# Altium PCB main.PcbDoc (part 7 of 16)
Units mil, origin at the board's own origin, x right, y up, seen from the top; angles counter-clockwise.
Board outline 8394.75 x 5164.44 mil, 7 copper layers (Top Layer 1, Layer 2, Layer 3, Unused, Layer 4_pow, Layer 5_gnd, Bottom 6+gnd), stack 64.043 mil thick; 364 components, 409 nets, 1932 pads, 1061 vias.
Unrouted connection lines stored in the file: 2.
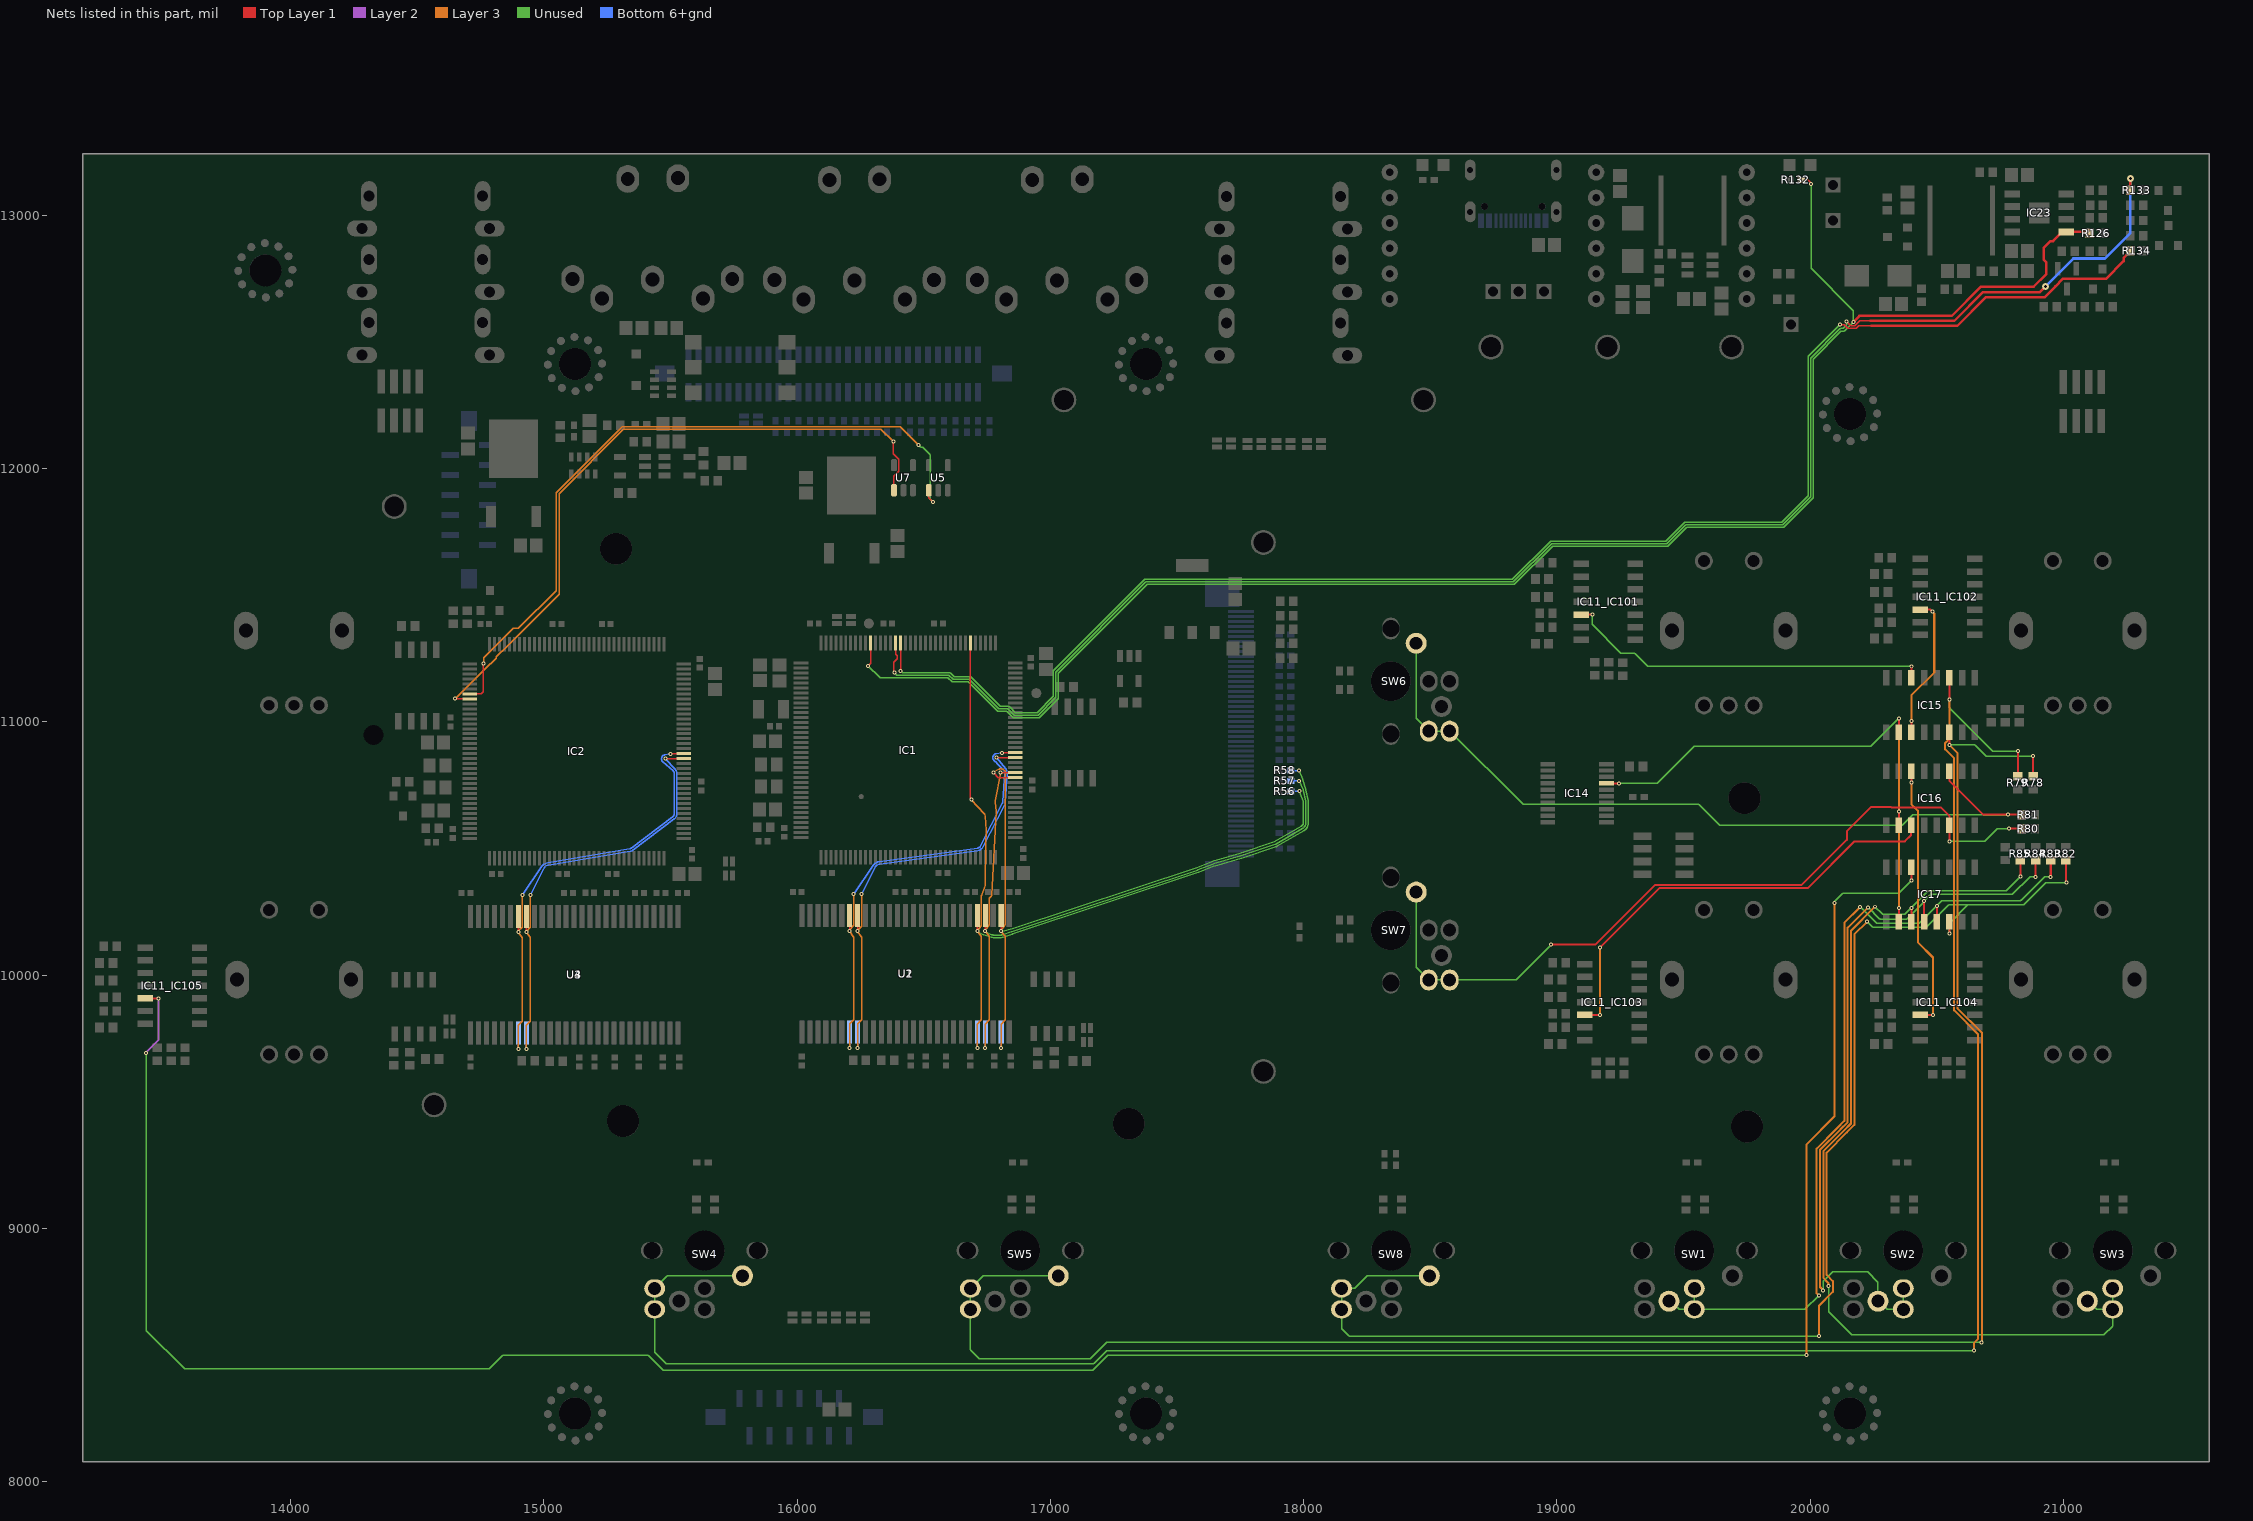
[diagram p10: the nets of this part, all layers, seen from the top]

## Via types
v1: diameter 15.75, hole 7.87, Top Layer 1 to Bottom 6+gnd, tented both sides, 961 vias
v2: diameter 27.56, hole 11.81, Top Layer 1 to Bottom 6+gnd, 45 vias
v3: diameter 23.62/23.62/23.62/23.62/23.62/23.62/23.62 (per signal layer), hole 12, Top Layer 1 to Bottom 6+gnd, tented top, 42 vias
v4: diameter 15.75, hole 7.87, Top Layer 1 to Bottom 6+gnd, 10 vias
v5: diameter 23.62/23.62/23.62/23.62/23.62/23.62/23.62 (per signal layer), hole 12, Top Layer 1 to Bottom 6+gnd, tented bottom, 3 vias

## Nets (pads, with @x,y where several pads share a name; then routed paths per layer and width w, separated by ;. In a path a pad name is that pad's centre, name@x,y a point inside that pad or via, vN(x,y) a via of type N, cw(c..) or ccw(c..) an arc to the next point about the centre after c; other vN are vias at no path point) (continued)
BA0_6: IC1.89 U1.20 U2.20 | length 2533.8
  Top Layer 1 w5: v1(16238.93,10174.13) U1.20@16238.93,10235.97 ; v1@16239.17,10174.38 U1.20@16239.17,10236.22 ; v1@16788.31,10859.29 IC1.89@16860.91,10859.29
  Layer 3 w5: v1(16238.93,9713.5) 16238.93,9805.11 cw(c16243.93,9805.12) 16240.37,9808.63 16253.59,9821.89 ; v1(16238.93,10174.13) ccw(c16243.89,10174.74) 16239.9,10171.73 16254.05,10152.93 ; v1@16238.93,10176.85 16238.93,10175.35 cw(c16243.89,10174.74) v1@16240.32,10178.25 ; v1@16240.33,10178.25 16253.59,10191.56 ccw(c16250.05,10195.09) 16255.05,10195 ; 16255.05,9825.38 16255.05,10150.02 ; 16255.05,10195.04 v1@16255.05,10316.84 ; 16253.59,9821.89 ccw(c16250.05,9825.42) 16255.05,9825.33 ; 16253.59,9821.89 ccw(c16250.05,9825.42) 16255.05,9825.33 ; 16253.59,9821.89 ccw(c16250.05,9825.42) 16255.05,9825.33 ; 16253.59,9821.89 ccw(c16250.05,9825.42) 16255.05,9825.33 ; 16253.59,9821.89 ccw(c16250.05,9825.42) 16255.05,9825.33 ; 16253.59,9821.89 ccw(c16250.05,9825.42) 16255.05,9825.33 ; 16253.59,9821.89 ccw(c16250.05,9825.42) 16255.05,9825.33 ; 16253.59,9821.89 ccw(c16250.05,9825.42) 16255.05,9825.33 ; 16253.59,9821.89 ccw(c16250.05,9825.42) 16255.05,9825.33 ; 16253.59,9821.89 ccw(c16250.05,9825.42) 16255.05,9825.33 ; 16253.59,9821.89 ccw(c16250.05,9825.42) 16255.05,9825.33 ; 16253.59,9821.89 ccw(c16250.05,9825.42) 16255.05,9825.33 ; 16253.59,9821.89 ccw(c16250.05,9825.42) 16255.05,9825.33 ; 16253.59,9821.89 ccw(c16250.05,9825.42) 16255.05,9825.33 ; 16253.59,9821.89 ccw(c16250.05,9825.42) 16255.05,9825.33 ; 16253.59,9821.89 ccw(c16250.05,9825.42) 16255.05,9825.33 ; 16254.05,10152.94 cw(c16250.05,10149.93) 16255.05,10150.02 ; 16254.05,10152.94 cw(c16250.05,10149.93) 16255.05,10150.02 ; 16254.05,10152.94 cw(c16250.05,10149.93) 16255.05,10150.02 ; 16254.05,10152.94 cw(c16250.05,10149.93) 16255.05,10150.02 ; 16254.05,10152.94 cw(c16250.05,10149.93) 16255.05,10150.02 ; 16254.05,10152.94 cw(c16250.05,10149.93) 16255.05,10150.02 ; 16254.05,10152.94 cw(c16250.05,10149.93) 16255.05,10150.02 ; 16254.05,10152.94 cw(c16250.05,10149.93) 16255.05,10150.02 ; 16254.05,10152.94 cw(c16250.05,10149.93) 16255.05,10150.02 ; 16254.05,10152.94 cw(c16250.05,10149.93) 16255.05,10150.02 ; 16254.05,10152.94 cw(c16250.05,10149.93) 16255.05,10150.02 ; 16254.05,10152.94 cw(c16250.05,10149.93) 16255.05,10150.02 ; 16254.05,10152.94 cw(c16250.05,10149.93) 16255.05,10150.02 ; 16254.05,10152.94 cw(c16250.05,10149.93) 16255.05,10150.02 ; 16254.05,10152.94 cw(c16250.05,10149.93) 16255.05,10150.02 ; 16254.05,10152.94 cw(c16250.05,10149.93) 16255.05,10150.02
  Bottom 6+gnd w5: v1@16239.17,9713.75 U2.20@16239.17,9775.59 ; v1(16254.76,10320.11) 16307.25,10424.96 ; v1(16788.23,10859.21) 16823.61,10815.7 ; 16307.25,10424.96 cw(c16329.94,10413.6) 16326.53,10438.74 ; 16307.25,10424.96 cw(c16329.94,10413.6) 16326.53,10438.74 ; 16307.25,10424.96 cw(c16329.94,10413.6) 16326.53,10438.74 ; 16307.25,10424.96 cw(c16329.94,10413.6) 16326.53,10438.74 ; 16307.25,10424.96 cw(c16329.94,10413.6) 16326.53,10438.74 ; 16307.25,10424.96 cw(c16329.94,10413.6) 16326.53,10438.74 ; 16307.25,10424.96 cw(c16329.94,10413.6) 16326.53,10438.74 ; 16307.25,10424.96 cw(c16329.94,10413.6) 16326.53,10438.74 ; 16307.25,10424.96 cw(c16329.94,10413.6) 16326.53,10438.74 ; 16307.25,10424.96 cw(c16329.94,10413.6) 16326.53,10438.74 ; 16307.25,10424.96 cw(c16329.94,10413.6) 16326.53,10438.74 ; 16307.25,10424.96 cw(c16329.94,10413.6) 16326.53,10438.74 ; 16307.25,10424.96 cw(c16329.94,10413.6) 16326.53,10438.74 ; 16307.25,10424.96 cw(c16329.94,10413.6) 16326.53,10438.74 ; 16307.25,10424.96 cw(c16329.94,10413.6) 16326.53,10438.74 ; 16307.25,10424.96 cw(c16329.94,10413.6) 16326.53,10438.74 ; 16326.53,10438.74 16713.7,10492.07 ccw(c16710.24,10517.2) 16732.79,10505.57 16819.54,10673.8 ; 16819.54,10673.8 ccw(c16796.99,10685.43) 16822.31,10683.89 ; 16819.54,10673.8 ccw(c16796.99,10685.43) 16822.31,10683.89 ; 16819.54,10673.8 ccw(c16796.99,10685.43) 16822.31,10683.89 ; 16819.54,10673.8 ccw(c16796.99,10685.43) 16822.31,10683.89 ; 16819.54,10673.8 ccw(c16796.99,10685.43) 16822.31,10683.89 ; 16819.54,10673.8 ccw(c16796.99,10685.43) 16822.31,10683.89 ; 16819.54,10673.8 ccw(c16796.99,10685.43) 16822.31,10683.89 ; 16819.54,10673.8 ccw(c16796.99,10685.43) 16822.31,10683.89 ; 16819.54,10673.8 ccw(c16796.99,10685.43) 16822.31,10683.89 ; 16819.54,10673.8 ccw(c16796.99,10685.43) 16822.31,10683.89 ; 16819.54,10673.8 ccw(c16796.99,10685.43) 16822.31,10683.89 ; 16819.54,10673.8 ccw(c16796.99,10685.43) 16822.31,10683.89 ; 16819.54,10673.8 ccw(c16796.99,10685.43) 16822.31,10683.89 ; 16819.54,10673.8 ccw(c16796.99,10685.43) 16822.31,10683.89 ; 16819.54,10673.8 ccw(c16796.99,10685.43) 16822.31,10683.89 ; 16819.54,10673.8 ccw(c16796.99,10685.43) 16822.31,10683.89 ; 16822.31,10683.89 16829.25,10798.15 ; 16823.61,10815.7 cw(c16803.93,10799.69) 16829.25,10798.16 ; 16823.61,10815.7 cw(c16803.93,10799.69) 16829.25,10798.16 ; 16823.61,10815.7 cw(c16803.93,10799.69) 16829.25,10798.16 ; 16823.61,10815.7 cw(c16803.93,10799.69) 16829.25,10798.16 ; 16823.61,10815.7 cw(c16803.93,10799.69) 16829.25,10798.15
BA1_6: IC1.90 U1.21 U2.21 | length 2022.6
  Top Layer 1 w5: v1(16207.43,10174.13) U1.21@16207.43,10235.97 ; v1@16207.68,10174.38 U1.21@16207.68,10236.22 ; v1(16808.23,10878.44) 16808.49,10878.71 16860.64,10878.71 IC1.90@16860.75,10878.82
  Layer 3 w5: v1(16207.43,9713.5) 16207.43,9805.11 cw(c16212.43,9805.12) 16208.88,9808.63 16222.1,9821.89 ; v1(16207.43,10174.13) ccw(c16211.59,10176.92) 16207.52,10174.01 16222.63,10152.83 ; v1@16207.43,10179.83 16207.43,10179.7 cw(c16211.59,10176.92) 16208.01,10180.41 16222.1,10194.54 ; 16223.55,9825.38 16223.55,10150.02 ; v1@16223.55,10319.82 16223.55,10198.02 ; 16222.1,9821.89 ccw(c16218.55,9825.42) 16223.55,9825.33 ; 16222.1,9821.89 ccw(c16218.55,9825.42) 16223.55,9825.33 ; 16222.1,9821.89 ccw(c16218.55,9825.42) 16223.55,9825.33 ; 16222.1,9821.89 ccw(c16218.55,9825.42) 16223.55,9825.33 ; 16222.1,9821.89 ccw(c16218.55,9825.42) 16223.55,9825.33 ; 16222.1,9821.89 ccw(c16218.55,9825.42) 16223.55,9825.33 ; 16222.1,9821.89 ccw(c16218.55,9825.42) 16223.55,9825.33 ; 16222.1,9821.89 ccw(c16218.55,9825.42) 16223.55,9825.33 ; 16222.1,9821.89 ccw(c16218.55,9825.42) 16223.55,9825.33 ; 16222.1,9821.89 ccw(c16218.55,9825.42) 16223.55,9825.33 ; 16222.1,9821.89 ccw(c16218.55,9825.42) 16223.55,9825.33 ; 16222.1,9821.89 ccw(c16218.55,9825.42) 16223.55,9825.33 ; 16222.1,9821.89 ccw(c16218.55,9825.42) 16223.55,9825.33 ; 16222.1,9821.89 ccw(c16218.55,9825.42) 16223.55,9825.33 ; 16222.1,9821.89 ccw(c16218.55,9825.42) 16223.55,9825.33 ; 16222.1,9821.89 ccw(c16218.55,9825.42) 16223.55,9825.33 ; 16222.1,10194.54 ccw(c16218.55,10198.07) 16223.55,10197.98 ; 16222.1,10194.54 ccw(c16218.55,10198.07) 16223.55,10197.98 ; 16222.1,10194.54 ccw(c16218.55,10198.07) 16223.55,10197.98 ; 16222.1,10194.54 ccw(c16218.55,10198.07) 16223.55,10197.98 ; 16222.1,10194.54 ccw(c16218.55,10198.07) 16223.55,10197.98 ; 16222.1,10194.54 ccw(c16218.55,10198.07) 16223.55,10197.98 ; 16222.1,10194.54 ccw(c16218.55,10198.07) 16223.55,10197.98 ; 16222.1,10194.54 ccw(c16218.55,10198.07) 16223.55,10197.98 ; 16222.1,10194.54 ccw(c16218.55,10198.07) 16223.55,10197.98 ; 16222.1,10194.54 ccw(c16218.55,10198.07) 16223.55,10197.98 ; 16222.1,10194.54 ccw(c16218.55,10198.07) 16223.55,10197.98 ; 16222.1,10194.54 ccw(c16218.55,10198.07) 16223.55,10197.98 ; 16222.1,10194.54 ccw(c16218.55,10198.07) 16223.55,10197.98 ; 16222.1,10194.54 ccw(c16218.55,10198.07) 16223.55,10197.98 ; 16222.1,10194.54 ccw(c16218.55,10198.07) 16223.55,10197.98 ; 16222.1,10194.54 ccw(c16218.55,10198.07) 16223.55,10197.98 ; 16222.62,10152.83 cw(c16218.55,10149.93) 16223.55,10150.02 ; 16222.62,10152.83 cw(c16218.55,10149.93) 16223.55,10150.02 ; 16222.62,10152.83 cw(c16218.55,10149.93) 16223.55,10150.02 ; 16222.62,10152.83 cw(c16218.55,10149.93) 16223.55,10150.02 ; 16222.62,10152.83 cw(c16218.55,10149.93) 16223.55,10150.02 ; 16222.62,10152.83 cw(c16218.55,10149.93) 16223.55,10150.02 ; 16222.62,10152.83 cw(c16218.55,10149.93) 16223.55,10150.02 ; 16222.62,10152.83 cw(c16218.55,10149.93) 16223.55,10150.02 ; 16222.62,10152.83 cw(c16218.55,10149.93) 16223.55,10150.02 ; 16222.62,10152.83 cw(c16218.55,10149.93) 16223.55,10150.02 ; 16222.62,10152.83 cw(c16218.55,10149.93) 16223.55,10150.02 ; 16222.62,10152.83 cw(c16218.55,10149.93) 16223.55,10150.02 ; 16222.62,10152.83 cw(c16218.55,10149.93) 16223.55,10150.02 ; 16222.62,10152.83 cw(c16218.55,10149.93) 16223.55,10150.02 ; 16222.62,10152.83 cw(c16218.55,10149.93) 16223.55,10150.02 ; 16222.62,10152.83 cw(c16218.55,10149.93) 16223.55,10150.02
  Bottom 6+gnd w5: v1@16207.68,9713.75 U2.21@16207.68,9775.59 ; v1(16223.27,10320.11) 16300.72,10433.55 cw(c16329.94,10413.6) 16325.11,10448.64 16712.33,10501.97 ccw(c16710.24,10517.2) 16723.9,10510.16 16810.65,10678.38 ccw(c16796.99,10685.43) 16812.33,10684.49 16819.27,10798.76 ccw(c16803.93,10799.69) 16814.85,10810.51 16792.52,10832.83 16792.52,10833.37 16783.46,10842.43 16783.27,10842.43 16777.31,10848.39 cw(c16788.23,10859.21) 16785.41,10874.33 ; 16785.41,10874.32 v1@16808.2,10878.58 ; v1(16808.23,10878.44) v1@16808.23,10878.55
BA01_7: IC2.89 U3.20 U4.20 | length 2319.1
  Top Layer 1 w5: v1@14930.87,10170.19 U3.20@14930.87,10232.03 ; v1@15480.01,10855.1 IC2.89@15552.61,10855.1
  Layer 3 w5: v1(14930.63,9709.47) 14930.63,9803 14946.75,9819.12 14946.75,10147.74 14945.53,10149.03 14931.6,10167.54 cw(c14935.59,10170.55) v1(14930.63,10169.94) ; v1@14930.63,10171.16 cw(c14935.59,10170.55) v1@14932.02,10174.06 ; v1@14932.03,10174.06 14945.29,10187.37 ccw(c14941.75,10190.9) 14946.75,10190.81 ; 14946.75,10190.85 v1@14946.75,10312.65
  Bottom 6+gnd w5: v1(14930.63,9709.47) 14930.63,9771.15 U4.20@14930.87,9771.4 ; v1@14946.22,10316.17 v1(14946.46,10315.92) 14998.95,10420.77 cw(c15021.64,10409.41) 15017.42,10434.43 15340.56,10489.38 ; v1@15479.68,10855.27 v1(15479.93,10855.02) 15518.63,10812.8 ; 15340.56,10489.38 ccw(c15336.31,10514.39) 15351.61,10494.16 ; 15340.56,10489.38 ccw(c15336.31,10514.39) 15351.61,10494.16 ; 15340.56,10489.38 ccw(c15336.31,10514.39) 15351.61,10494.16 ; 15340.56,10489.38 ccw(c15336.31,10514.39) 15351.61,10494.16 ; 15340.56,10489.38 ccw(c15336.31,10514.39) 15351.61,10494.16 ; 15340.56,10489.38 ccw(c15336.31,10514.39) 15351.61,10494.16 ; 15340.56,10489.38 ccw(c15336.31,10514.39) 15351.61,10494.16 ; 15340.56,10489.38 ccw(c15336.31,10514.39) 15351.61,10494.16 ; 15340.56,10489.38 ccw(c15336.31,10514.39) 15351.61,10494.16 ; 15340.56,10489.38 ccw(c15336.31,10514.39) 15351.61,10494.16 ; 15340.56,10489.38 ccw(c15336.31,10514.39) 15351.61,10494.16 ; 15340.56,10489.38 ccw(c15336.31,10514.39) 15351.61,10494.16 ; 15340.56,10489.38 ccw(c15336.31,10514.39) 15351.61,10494.16 ; 15340.56,10489.38 ccw(c15336.31,10514.39) 15351.61,10494.16 ; 15340.56,10489.38 ccw(c15336.31,10514.39) 15351.61,10494.16 ; 15340.56,10489.38 ccw(c15336.31,10514.39) 15351.61,10494.16 ; 15351.62,10494.16 15515.24,10617.94 ; 15515.24,10617.94 ccw(c15499.93,10638.17) 15525.3,10638.17 ; 15515.24,10617.94 ccw(c15499.93,10638.17) 15525.3,10638.17 ; 15515.24,10617.94 ccw(c15499.93,10638.17) 15525.3,10638.17 ; 15515.24,10617.94 ccw(c15499.93,10638.17) 15525.3,10638.17 ; 15515.24,10617.94 ccw(c15499.93,10638.17) 15525.3,10638.17 ; 15518.63,10812.8 cw(c15499.93,10795.65) 15525.3,10795.65 ; 15518.63,10812.8 cw(c15499.93,10795.65) 15525.3,10795.65 ; 15518.63,10812.8 cw(c15499.93,10795.65) 15525.3,10795.65 ; 15518.63,10812.8 cw(c15499.93,10795.65) 15525.3,10795.65 ; 15518.63,10812.8 cw(c15499.93,10795.65) 15525.3,10795.65 ; 15518.63,10812.8 cw(c15499.93,10795.65) 15525.3,10795.65 ; 15518.63,10812.8 cw(c15499.93,10795.65) 15525.3,10795.65 ; 15518.63,10812.8 cw(c15499.93,10795.65) 15525.3,10795.65 ; 15518.63,10812.8 cw(c15499.93,10795.65) 15525.3,10795.65 ; 15518.63,10812.8 cw(c15499.93,10795.65) 15525.3,10795.65 ; 15518.63,10812.8 cw(c15499.93,10795.65) 15525.3,10795.65 ; 15518.63,10812.8 cw(c15499.93,10795.65) 15525.3,10795.65 ; 15518.63,10812.8 cw(c15499.93,10795.65) 15525.3,10795.65 ; 15518.63,10812.8 cw(c15499.93,10795.65) 15525.3,10795.65 ; 15518.63,10812.8 cw(c15499.93,10795.65) 15525.3,10795.65 ; 15518.63,10812.8 cw(c15499.93,10795.65) 15525.3,10795.65 ; 15525.3,10638.17 15525.3,10795.65
BA11_7: IC2.90 U3.21 U4.21 | length 2339
  Top Layer 1 w5: v1@14899.38,10170.19 U3.21@14899.38,10232.03 ; v1@15500.16,10874.63 IC2.90@15552.45,10874.63
  Layer 3 w5: v1(14899.13,9709.47) 14899.13,9803 14915.25,9819.12 14915.25,10147.71 14914.08,10148.98 14899.22,10169.82 cw(c14903.29,10172.73) v1(14899.13,10169.94) ; v1@14899.13,10175.64 14899.13,10175.51 cw(c14903.29,10172.73) 14899.71,10176.22 14913.8,10190.35 ; 14915.25,10193.83 v1@14915.25,10315.63 ; 14913.8,10190.35 ccw(c14910.25,10193.88) 14915.25,10193.79 ; 14913.8,10190.35 ccw(c14910.25,10193.88) 14915.25,10193.79 ; 14913.8,10190.35 ccw(c14910.25,10193.88) 14915.25,10193.79 ; 14913.8,10190.35 ccw(c14910.25,10193.88) 14915.25,10193.79 ; 14913.8,10190.35 ccw(c14910.25,10193.88) 14915.25,10193.79 ; 14913.8,10190.35 ccw(c14910.25,10193.88) 14915.25,10193.79 ; 14913.8,10190.35 ccw(c14910.25,10193.88) 14915.25,10193.79 ; 14913.8,10190.35 ccw(c14910.25,10193.88) 14915.25,10193.79 ; 14913.8,10190.35 ccw(c14910.25,10193.88) 14915.25,10193.79 ; 14913.8,10190.35 ccw(c14910.25,10193.88) 14915.25,10193.79 ; 14913.8,10190.35 ccw(c14910.25,10193.88) 14915.25,10193.79 ; 14913.8,10190.35 ccw(c14910.25,10193.88) 14915.25,10193.79 ; 14913.8,10190.35 ccw(c14910.25,10193.88) 14915.25,10193.79 ; 14913.8,10190.35 ccw(c14910.25,10193.88) 14915.25,10193.79 ; 14913.8,10190.35 ccw(c14910.25,10193.88) 14915.25,10193.79 ; 14913.8,10190.35 ccw(c14910.25,10193.88) 14915.25,10193.79
  Bottom 6+gnd w5: v1(14899.13,9709.47) 14899.13,9771.15 U4.21@14899.38,9771.4 ; v1@14914.72,10316.17 v1(14914.97,10315.92) 14992.42,10429.36 ; v1@15499.68,10874.64 v1(15499.93,10874.39) 15477.11,10870.13 ccw(c15479.93,10855.02) 15469.64,10843.6 15510.21,10807.08 cw(c15499.93,10795.65) 15515.3,10795.65 15515.3,10638.17 ; 14992.42,10429.36 cw(c15021.64,10409.41) 15015.71,10444.28 ; 14992.42,10429.36 cw(c15021.64,10409.41) 15015.71,10444.28 ; 14992.42,10429.36 cw(c15021.64,10409.41) 15015.71,10444.28 ; 14992.42,10429.36 cw(c15021.64,10409.41) 15015.71,10444.28 ; 14992.42,10429.36 cw(c15021.64,10409.41) 15015.71,10444.28 ; 14992.42,10429.36 cw(c15021.64,10409.41) 15015.71,10444.28 ; 14992.42,10429.36 cw(c15021.64,10409.41) 15015.71,10444.28 ; 14992.42,10429.36 cw(c15021.64,10409.41) 15015.71,10444.28 ; 14992.42,10429.36 cw(c15021.64,10409.41) 15015.71,10444.28 ; 14992.42,10429.36 cw(c15021.64,10409.41) 15015.71,10444.28 ; 14992.42,10429.36 cw(c15021.64,10409.41) 15015.71,10444.28 ; 14992.42,10429.36 cw(c15021.64,10409.41) 15015.71,10444.28 ; 14992.42,10429.36 cw(c15021.64,10409.41) 15015.71,10444.28 ; 14992.42,10429.36 cw(c15021.64,10409.41) 15015.71,10444.28 ; 14992.42,10429.36 cw(c15021.64,10409.41) 15015.71,10444.28 ; 14992.42,10429.36 cw(c15021.64,10409.41) 15015.71,10444.28 ; 15015.71,10444.28 15338.88,10499.24 ccw(c15336.31,10514.39) 15345.58,10502.13 15509.2,10625.91 ; 15509.21,10625.92 ccw(c15499.93,10638.17) 15515.3,10638.17 ; 15509.21,10625.92 ccw(c15499.93,10638.17) 15515.3,10638.17 ; 15509.21,10625.92 ccw(c15499.93,10638.17) 15515.3,10638.17 ; 15509.21,10625.92 ccw(c15499.93,10638.17) 15515.3,10638.17 ; 15509.2,10625.91 ccw(c15499.93,10638.17) 15515.3,10638.17
BTN_1: IC11_IC101.12 IC15.14 | length 1458.7
  Top Layer 1 w8: IC11_IC101.12@19095.43,11423.82 19138.82,11423.82 v1(19140,11425) ; IC15.14@20400,11173.82 v1(20400,11220)
  Unused w5: v1(19140,11425) 19140,11387.07 ccw(c19145,11387.07) 19141.45,11383.55 19253.12,11271.88 ccw(c19256.64,11275.43) 19256.64,11270.43 19305.82,11270.43 cw(c19305.82,11265.43) 19309.33,11268.99 19356.87,11221.45 ccw(c19360.39,11225) 19360.39,11220 v1(20400,11220)
BTN_2: IC11_IC102.12 IC15.3 | length 568.1
  Top Layer 1 w8: IC15.3@20400,10959.25 v1(20400,11003.54) ; IC11_IC102.12@20435,11443.82 20475,11443.82 v1(20482.5,11436.32)
  Layer 3 w8: v1(20400,11003.54) 20400,11105 20490,11195 20490,11428.82 v1(20482.5,11436.32)
BTN_3: IC11_IC103.12 IC16.3 | length 1775.9
  Top Layer 1 w8: IC11_IC103.12@19110.43,9843.82 v1(19170,9843.82) ; v1(19170,10108.82) 19404.86,10343.68 19989.8,10343.68 20175,10528.88 20373.78,10528.88 20398.61,10553.71 20398.61,10590.15 IC16.3@20400,10591.53
  Layer 3 w8: v1(19170,9843.82) v1(19170,10108.82)
BTN_4: IC11_IC104.12 IC16.14 | length 1047.5
  Top Layer 1 w8: v1(20400,10761.81) IC16.14@20400,10806.1 ; IC11_IC104.12@20435,9843.82 v1(20485,9843.82)
  Layer 3 w8: v1(20400,10761.81) 20400,10675 20425,10650 20425,10130 20485,10070 v1(20485,9843.82)
BTN_5: IC11_IC105.12 IC17.14 | length 10296.6
  Top Layer 1 w8: IC11_IC105.12@13425.86,9908.82 v1(13478.15,9908.82) ; v1(20400,10373.82) IC17.14@20400,10426.1
  Layer 2 w8: v1(13429.65,9693.82) 13429.65,9695.31 13478.15,9743.82 v1(13478.15,9908.82)
  Unused w5: v1(13429.65,9693.82) 13429.65,8600.56 ccw(c13434.65,8600.56) 13431.09,8597.04 13580.39,8447.75 ccw(c13583.91,8451.3) 13583.91,8446.3 14783.08,8446.3 ccw(c14783.08,8451.3) 14786.6,8447.75 14836.41,8497.55 cw(c14839.93,8494) 14839.93,8499 15410.31,8499 cw(c15410.31,8494) 15413.83,8497.55 15469.85,8441.53 ccw(c15473.37,8445.08) 15473.37,8440.08 17164.91,8440.08 ccw(c17164.91,8445.08) 17168.43,8441.53 17225.29,8498.39 cw(c17228.81,8494.84) 17228.81,8499.84 19978.2,8499.84 19982.46,8499.9 ccw(c19982.38,8504.9) v1(19985.94,8501.39) ; v1(20096.12,10285.74) 20097.77,10291.84 cw(c20102.6,10290.53) 20099.05,10294.05 20126.55,10321.55 cw(c20130.07,10318) 20130.07,10323 20347.11,10323 ccw(c20347.11,10328) 20350.63,10324.45 v1(20400,10373.82)
  Layer 3 w8: v1(19985.94,8501.39) 19986.2,8501.65 19986.2,9332.52 20096.28,9442.6 20096.28,10285.57 v1(20096.12,10285.74)
BTN_DN: IC16.6 R80.1 SW7.S1 | length 3145.1
  Top Layer 1 w8: v1(18977.44,10120.5) 19152.16,10120.5 19388.34,10356.68 19966.68,10356.68 20145,10535 20145,10568.82 20240,10663.82 20320,10663.82 20320.84,10662.98 20515.84,10662.98 20549.46,10629.36 20549.46,10592.08 IC16.6@20550,10591.53 v1(20550,10528.82) ; v1(20785,10578.82) R80.1@20835,10578.82
  Unused w5: SW7.S1@18444.49,10328.22 18444.49,10033.05 ccw(c18449.49,10033.05) 18445.93,10029.53 SW7.S1@18494.09,9981.37 18836.24,9981.37 ccw(c18836.24,9986.37) 18839.76,9982.82 v1(18977.44,10120.5) ; v1(20550,10528.82) 20686.92,10528.82 ccw(c20686.92,10533.82) 20690.44,10530.27 20737.55,10577.37 cw(c20741.07,10573.82) 20741.07,10578.82 v1(20785,10578.82)
BTN_FUNC: IC17.6 R82.1 SW8.S1 | length 5304.7
  Top Layer 1 w8: v1(20549.62,10164) IC17.6@20549.62,10211.15 ; R82.1@21010,10453.86 21010,10367.7 v1(21011.35,10366.35)
  Unused w5: SW8.S1@18496.46,8813.12 18252.04,8813.12 ccw(c18252.04,8808.12) 18248.52,8811.67 18201.81,8764.97 cw(c18198.29,8768.52) 18198.29,8763.52 SW8.S1@18149.61,8763.52 18149.61,8607.46 ccw(c18154.61,8607.46) 18151.06,8603.94 18178.55,8576.45 ccw(c18182.07,8580) 18182.07,8575 v1(20035,8575) ; v1(20224.83,10211.6) ccw(c20228.48,10215.01) 20224.92,10211.5 20244.97,10191.45 ccw(c20248.49,10195) 20248.49,10190 20457.1,10190 ccw(c20457.1,10195) 20460.62,10191.45 20545.46,10276.29 cw(c20548.98,10272.74) 20548.98,10277.74 20622.61,10277.74 ; v1(20549.62,10164) 20549.62,10202.68 cw(c20554.62,10202.68) 20551.07,10206.2 20622.61,10277.74 ; v1(21011.35,10366.35) cw(c21007.93,10370) 21007.96,10365 20931.17,10365 ccw(c20931.17,10360) 20927.65,10363.55 20843.29,10279.19 cw(c20839.77,10282.74) 20839.77,10277.74 20622.61,10277.74
  Layer 3 w8: v1(20035,8575) 20035,8695 20089.63,8749.63 20089.63,8791.86 20064.77,8816.73 20064.77,9299.55 20145,9379.79 20145,9380 20174.28,9409.28 20174.28,10161.05 v1(20224.83,10211.6)
BTN_N: IC15.6 R78.1 SW5.S1 | length 7535.8
  Top Layer 1 w8: v1(20550,10910) IC15.6@20550,10959.25 ; R78.1@20880,10785 v1(20880,10865)
  Unused w5: SW5.S1@17031.21,8813.12 16736.04,8813.12 ccw(c16736.04,8808.12) 16732.52,8811.67 SW5.S1@16684.36,8763.52 16684.36,8522.71 ccw(c16689.36,8522.71) 16685.81,8519.19 16718.55,8486.45 ccw(c16722.07,8490) 16722.07,8485 17153.39,8485 ccw(c17153.39,8490) 17156.91,8486.45 17219.98,8549.52 cw(c17223.5,8545.97) 17223.5,8550.97 20674.2,8550.97 cw(c20674.16,8545.97) v1(20677.39,8549.78) ; v1(20550,10910) 20647.44,10910 cw(c20647.44,10905) 20650.95,10908.56 20693.55,10866.45 ccw(c20697.07,10870) 20697.07,10865 v1(20880,10865)
  Layer 3 w8: v1(20550,10910) 20581.6,10878.4 20581.6,9870.29 20678.46,9773.43 20678.46,8550.85 v1(20677.39,8549.78)
BTN_PLAY: IC17.4 R84.1 SW2.S2 | length 3049.6
  Top Layer 1 w8: IC17.4@20450,10211.53 v1(20450,10293.82) ; v1(20889.29,10388.79) 20890,10389.5 R84.1@20890,10453.86
  Unused w5: v1(20051.49,8756.15) 20051.49,8789.42 cw(c20056.49,8789.42) 20052.94,8792.94 20088.55,8828.55 cw(c20092.07,8825) 20092.07,8830 20222.93,8830 cw(c20222.93,8825) 20226.45,8828.55 20266.28,8788.72 cw(c20262.72,8785.2) 20267.72,8785.2 SW2.S2@20267.72,8713.12 20269.89,8713.12 cw(c20269.89,8708.12) 20273.43,8711.66 20302.8,8682.28 ccw(c20306.32,8685.84) 20306.32,8680.84 SW2.S2@20367.72,8680.84 SW2.S2@20367.72,8763.52 ; v1(20228.83,10268.28) 20273.73,10223.39 ccw(c20277.25,10226.94) 20277.25,10221.94 20380.81,10221.94 ccw(c20380.81,10226.94) 20384.32,10223.39 20444.88,10283.94 ccw(c20441.33,10287.46) 20445.82,10285.26 v1(20450,10293.82) 20474.73,10318.55 cw(c20478.25,10315) 20478.25,10320 20796.76,10320 ccw(c20796.76,10325) 20800.28,10321.45 20866.18,10387.35 cw(c20869.7,10383.79) 20869.7,10388.79 v1(20889.29,10388.79)
  Layer 3 w8: v1(20051.49,8756.15) 20038.77,8768.88 20038.77,9310.32 20119,9390.56 20119,9390.77 20148.28,9420.05 20148.28,10187.73 v1(20228.83,10268.28)
  Bottom 6+gnd w8: SW2.S2@20367.72,8680.84 SW2.S2@20367.72,8682.94
BTN_REC: IC17.5 R83.1 SW1.S2 | length 3299.5
  Top Layer 1 w8: IC17.5@20500,10211.53 v1(20500,10273.82) ; v1(20949.8,10388.45) 20950,10388.65 R83.1@20950,10453.27
  Unused w5: SW1.S2@19442.61,8713.12 19447.03,8713.12 cw(c19447.03,8708.12) 19450.54,8711.68 19480.27,8682.29 ccw(c19483.79,8685.84) 19483.79,8680.84 SW1.S2@19542.61,8680.84 ; SW1.S2@19542.61,8763.52 SW1.S2@19542.61,8680.84 ; v1(20034.13,8735.07) 19981.34,8682.29 cw(c19977.82,8685.84) 19977.82,8680.84 SW1.S2@19542.61,8680.84 ; v1(20197.54,10269.57) 20260.66,10206.45 ccw(c20264.18,10210) 20264.18,10205 20429.11,10205 ccw(c20429.11,10210) 20432.63,10206.45 20519.73,10293.55 cw(c20523.25,10290) 20523.25,10295 20829.53,10295 ccw(c20829.53,10300) 20833.05,10296.45 20923.6,10387 cw(c20927.12,10383.45) 20927.12,10388.45 v1(20949.8,10388.45)
  Layer 3 w8: v1(20034.13,8735.07) 20034.13,8735.27 20025.77,8743.63 20025.77,9315.71 20106,9395.94 20106,9396.15 20135.28,9425.44 20135.28,10207.3 v1(20197.54,10269.57)
BTN_STOP: IC17.3 R85.1 SW3.S2 | length 3894
  Top Layer 1 w8: IC17.3@20400,10211.53 v1(20400,10265.82) ; R85.1@20830,10453.86 20830,10389.63 v1(20830.15,10389.48)
  Unused w5: v1(20072.76,8772.04) 20072.76,8673.96 ccw(c20077.76,8673.96) 20074.21,8670.44 20162.96,8581.69 ccw(c20166.48,8585.24) 20166.48,8580.24 21158.17,8580.24 ccw(c21158.17,8585.24) 21161.69,8581.69 21193.05,8613.05 ccw(c21189.5,8616.57) 21194.5,8616.57 SW3.S2@21194.5,8680.84 ; v1(20255.41,10270.42) 20283.72,10242.11 ccw(c20287.24,10245.67) 20287.24,10240.67 20372.78,10240.67 ccw(c20372.78,10245.67) 20376.3,10242.11 v1(20400,10265.82) cw(c20405,10265.61) 20401.44,10269.12 20463.84,10331.52 cw(c20467.39,10328) 20467.39,10333 20771.6,10333 ccw(c20771.6,10338) 20775.12,10334.45 v1(20830.15,10389.48) ; SW3.S2@21094.5,8713.12 21096.66,8713.12 cw(c21096.66,8708.12) 21100.2,8711.66 21129.58,8682.28 ccw(c21133.09,8685.84) 21133.09,8680.84 SW3.S2@21194.5,8680.84 ; SW3.S2@21194.5,8763.52 SW3.S2@21194.5,8680.84
  Layer 3 w8: v1(20072.76,8772.04) 20072.55,8772.25 20072.55,8783.94 20051.77,8804.71 20051.77,9304.94 20132,9385.17 20132,9385.38 20161.28,9414.67 20161.28,10176.3 v1(20255.41,10270.42)
BTN_UP: IC16.11 R81.1 SW6.S1 | length 3203.9
  Top Layer 1 w8: IC16.11@20550,10806.1 20550,10768.05 20684.23,10633.82 v1(20781.18,10633.82) R81.1@20835,10633.82
  Unused w5: SW6.S1@18444.49,11310.81 18444.49,11015.64 ccw(c18449.49,11015.64) 18445.93,11012.12 SW6.S1@18494.09,10963.96 SW6.S1@18576.77,10963.96 18864.28,10676.45 ccw(c18867.8,10680) 18867.8,10675 19557.93,10675 cw(c19557.93,10670) 19561.46,10673.54 19642.3,10592.7 ccw(c19645.81,10596.26) 19645.81,10591.26 20359.19,10591.26 ccw(c20359.19,10596.26) 20362.71,10592.71 20402.37,10632.37 cw(c20405.89,10628.82) 20405.89,10633.82 v1(20781.18,10633.82)
BTN_Y: IC15.11 R79.1 SW4.S1 | length 9065.2
  Top Layer 1 w8: IC15.11@20550,11173.82 20550,11088.84 v1(20550.5,11088.34) ; R79.1@20820,10785 v1(20820,10885)
  Unused w5: SW4.S1@15784.53,8813.12 15489.36,8813.12 ccw(c15489.36,8808.12) 15485.84,8811.67 SW4.S1@15437.68,8763.52 15437.68,8512.54 ccw(c15442.68,8512.54) 15439.13,8509.02 15480.62,8467.53 ccw(c15484.14,8471.08) 15484.14,8466.08 17169.01,8466.08 ccw(c17169.01,8471.08) 17172.53,8467.53 17221.81,8516.81 cw(c17225.33,8513.26) 17225.33,8518.26 20644.18,8518.26 cw(c20644.14,8513.26) v1(20646.5,8517.67) ; v1(20550.5,11088.34) ccw(c20555,11086.16) 20550,11086.19 20550,11057.07 ccw(c20555,11057.07) 20551.45,11053.55 20718.55,10886.45 ccw(c20722.07,10890) 20722.07,10885 v1(20820,10885)
  Layer 3 w8: v1(20550.5,11088.34) 20550.5,10934.36 20533.13,10916.99 20533.13,10891.87 20568.6,10856.4 20568.6,9861.4 20662,9768 20662,8563.35 20646.32,8547.67 20646.32,8517.85 v1(20646.5,8517.67)
CHARGE_STATUS: IC1.134 IC23.1 R126.1 R132.2 | length 6914
  Top Layer 1 w5: v1(16279.71,11221.38) 16290.51,11232.18 IC1.134@16290.51,11311.57 ; R132.2@19965.28,13140 19990.5,13140 20004.12,13126.37 v1(20004.12,13124.93)
  Top Layer 1 w10: v1(20170.63,12580) 20194.06,12603.43 20559.19,12603.43 20674.76,12719.01 20882.94,12719.01 20932.43,12768.49 20932.43,12814.72 20921.87,12825.28 20921.87,12871.51 20949.22,12898.86 20959.04,12898.86 20995.18,12935 IC23.1@21011.42,12935 21099.65,12935 R126.1@21104.65,12930
  Unused w5: v1(16279.71,11221.38) 16325.37,11175.72 ccw(c16328.89,11179.27) 16328.89,11174.27 16593.62,11174.27 cw(c16593.62,11169.27) 16597.14,11172.83 16609.69,11160.27 ccw(c16613.22,11163.82) 16613.22,11158.82 16674.97,11158.82 cw(c16674.97,11153.82) 16678.5,11157.35 16792.68,11043.18 ccw(c16796.19,11046.74) 16796.19,11041.74 16826.18,11041.74 cw(c16826.18,11036.74) 16829.69,11040.29 16852.97,11017.28 ccw(c16856.5,11020.83) 16856.5,11015.83 16952.94,11015.83 ccw(c16952.94,11020.83) 16956.46,11017.28 17029.7,11090.52 ccw(c17026.15,11094.04) 17031.15,11094.04 17031.15,11191.47 cw(c17036.15,11191.47) 17032.6,11194.99 17379.76,11542.15 cw(c17383.28,11538.6) 17383.28,11543.6 18831,11543.6 ccw(c18831,11548.6) 18834.52,11545.05 18981.84,11692.37 cw(c18985.36,11688.82) 18985.36,11693.82 19436.21,11693.82 ccw(c19436.21,11698.82) 19439.73,11695.27 19511.46,11766.99 cw(c19514.98,11763.44) 19514.98,11768.44 19894.66,11768.44 ccw(c19894.66,11773.44) 19898.18,11769.89 20010.78,11882.49 ccw(c20007.23,11886.01) 20012.23,11886.01 20012.23,12430.93 cw(c20017.23,12430.93) 20013.68,12434.45 20121.4,12542.18 cw(c20124.92,12538.63) 20124.92,12543.63 20133.56,12543.63 ccw(c20133.56,12548.63) 20137.08,12545.08 20170.63,12578.63 v1(20170.63,12580) 20170.63,12622.57 ccw(c20165.63,12622.57) 20169.17,12626.11 20005.57,12789.71 cw(c20009.12,12793.22) 20004.12,12793.19 v1(20004.12,13124.93)
CHR1: IC1.129 R133.1 | length 6524.1
  Top Layer 1 w5: v1(16383.7,11194.81) 16381.64,11196.87 16381.64,11201.01 16381.02,11201.63 16381.02,11235.25 16394.61,11248.84 16394.61,11261.57 16388.94,11267.24 IC1.129@16388.94,11311.57 ; v1(20144.08,12580.88) 20160.34,12564.63 20177,12564.63 20196.53,12584.16 20237.55,12584.16
  Top Layer 1 w10: 20237.55,12584.16 20569.62,12584.16 20682.66,12697.2 20906.85,12697.2 v2(20929.65,12720) ; v2(21264.1,13145.76) 21264.1,13100.54 R133.1@21264.65,13100
  Unused w5: v1(16383.7,11194.81) ccw(c16388.49,11196.24) 16384.93,11192.73 16391.93,11185.72 ccw(c16395.45,11189.27) 16395.45,11184.27 16597.76,11184.27 cw(c16597.76,11179.27) 16601.27,11182.83 16613.84,11170.27 ccw(c16617.36,11173.82) 16617.36,11168.82 16679.11,11168.82 cw(c16679.11,11163.82) 16682.63,11167.37 16796.81,11053.19 ccw(c16800.33,11056.74) 16800.33,11051.74 16830.59,11051.74 cw(c16830.59,11046.74) 16834.1,11050.29 16857.12,11027.28 ccw(c16860.64,11030.83) 16860.64,11025.83 16948.8,11025.83 ccw(c16948.8,11030.83) 16952.32,11027.28 17019.7,11094.66 ccw(c17016.15,11098.18) 17021.15,11098.18 17021.15,11195.61 cw(c17026.15,11195.61) 17022.6,11199.13 17375.62,11552.15 cw(c17379.14,11548.6) 17379.14,11553.6 18826.85,11553.6 ccw(c18826.85,11558.6) 18830.37,11555.05 18977.69,11702.37 cw(c18981.21,11698.82) 18981.21,11703.82 19432.07,11703.82 ccw(c19432.07,11708.82) 19435.59,11705.27 19507.32,11776.99 cw(c19510.84,11773.44) 19510.84,11778.44 19890.52,11778.44 ccw(c19890.52,11783.44) 19894.04,11779.89 20000.78,11886.64 ccw(c19997.23,11890.16) 20002.23,11890.16 20002.23,12435.08 cw(c20007.23,12435.08) 20003.68,12438.6 20117.26,12552.18 cw(c20120.78,12548.63) 20120.78,12553.63 20127.35,12553.63 ccw(c20127.35,12558.63) 20130.87,12555.08 20142.63,12566.83 ccw(c20139.08,12570.35) 20144.08,12570.35 v1(20144.08,12580.88)
  Bottom 6+gnd w10: v2(20929.65,12720) 21039.65,12830 21163.35,12830 21264.1,12930.75 v2(21264.1,13145.76)
CHR2: IC1.128 R134.1 | length 6188.8
  Top Layer 1 w5: IC1.128@16408.62,11311.57 16408.62,11201.77 v1(16408.67,11201.72) ; v1(20117.63,12569) 20134.22,12569 20148.6,12554.63 20181.14,12554.63 20190.91,12564.4 20242.23,12564.4
  Top Layer 1 w10: 20242.23,12564.3 20580.72,12564.3 20692.99,12676.57 20925.51,12676.57 20968.07,12719.14 20968.07,12720.23 20997.22,12749.37 21033.22,12749.37 21167.91,12749.37 21237.99,12819.45 21237.99,12832.55 21263.46,12858.03 R134.1@21263.46,12860
  Unused w5: v1(16408.67,11201.72) cw(c16406.69,11197.13) 16410.22,11200.67 16415.18,11195.71 ccw(c16418.69,11199.27) 16418.69,11194.27 16602.64,11194.27 cw(c16602.64,11189.27) 16606.16,11192.83 16618.72,11180.27 ccw(c16622.24,11183.82) 16622.24,11178.82 16683.25,11178.82 cw(c16683.25,11173.82) 16686.79,11177.35 16800.96,11063.18 ccw(c16804.47,11066.74) 16804.47,11061.74 16834.46,11061.74 cw(c16834.46,11056.74) 16837.83,11060.43 16840.69,11057.82 cw(c16830.59,11046.74) 16841.2,11057.34 16861.26,11037.28 ccw(c16864.78,11040.83) 16864.78,11035.83 16944.66,11035.83 ccw(c16944.66,11040.83) 16948.18,11037.28 17009.7,11098.8 ccw(c17006.15,11102.32) 17011.15,11102.32 17011.15,11199.75 cw(c17016.15,11199.75) 17012.6,11203.27 ; 17012.6,11203.27 17371.48,11562.15 cw(c17375,11558.6) 17375,11563.6 18822.71,11563.6 ccw(c18822.71,11568.6) 18826.23,11565.05 18973.55,11712.37 cw(c18977.07,11708.82) 18977.07,11713.82 19427.93,11713.82 ccw(c19427.93,11718.82) 19431.45,11715.27 19503.18,11786.99 cw(c19506.7,11783.44) 19506.7,11788.44 19886.37,11788.44 ccw(c19886.37,11793.44) 19889.89,11789.89 19990.78,11890.78 ccw(c19987.23,11894.3) 19992.23,11894.3 19992.23,12441.53 cw(c19997.23,12441.53) 19993.68,12445.05 v1(20117.63,12569)
CLK: IC14.17 IC15.2 IC16.2 IC17.2 | length 2171.4
  Top Layer 1 w8: IC14.17@19195.67,10757.2 v1(19245,10757.2) ; IC17.2@20350,10211.53 v1(20350,10266.1) ; IC16.2@20350,10591.53 v1(20350,10646.1) ; IC15.2@20350,10959.25 v1(20350,11013.82)
  Unused w5: v1(19245,10757.2) 19392.9,10757.2 ccw(c19392.9,10762.2) 19396.42,10758.65 19540.08,10902.32 cw(c19543.6,10898.77) 19543.6,10903.77 20237.88,10903.77 ccw(c20237.88,10908.77) 20241.4,10905.22 v1(20350,11013.82)
  Layer 3 w8: v1(20350,10266.1) v1(20350,10646.1) v1(20350,11013.82)
CODEC_GPIO1: IC2.7 U5.1 | length 2846.6
  Top Layer 1 w5: IC2.7@14707.15,11111.01 14752.23,11111.01 14761.48,11120.26 14761.48,11230.5 v1(14760.86,11231.13) ; U5.1@16520,11915 16520,11885 v1(16535.91,11869.09)
  Unused w5: v1(16479.29,12094.57) 16487.04,12086.82 ccw(c16490.56,12090.37) 16490.56,12085.37 16493.44,12085.37 cw(c16493.44,12080.37) 16496.97,12083.91 16520.65,12060.23 16523.54,12057.35 cw(c16520,12053.81) 16525,12053.81 16525,11882.07 ccw(c16530,11882.07) 16526.45,11878.55 v1(16535.91,11869.09)
  Layer 3 w5: v1(14760.86,11231.13) 14762.91,11233.19 14762.91,11252.74 14879.8,11369.63 14899.65,11369.63 15048.42,11518.4 15048.42,11904.44 15309.76,12165.77 16408.05,12165.77 v1(16479.29,12094.57)
CODEC_GPIO2: IC2.8 U7.1 | length 2696.1
  Top Layer 1 w5: v1(14648.98,11092.54) 14650.2,11091.32 IC2.8@14707.15,11091.32 ; v1(16380.62,12107.57) 16380.62,12058.44 16401.71,12037.34 16401.71,11990.29 16382.6,11971.18 U7.1@16382.6,11915
  Layer 3 w5: v1(14648.98,11092.54) 14650.69,11092.54 14788.15,11230 14789.51,11230 14811.33,11251.82 14811.33,11256.99 14833.15,11278.81 14835.03,11278.81 15060,11503.78 15060,11901.88 15313.9,12155.77 16330.79,12155.77 16378.99,12107.57 v1(16380.62,12107.57)
D0: IC1.85 R56.2 U1.2 U2.2 | length 2817.5
  Top Layer 1 w5: v1(16775.56,10800.87) 16775.56,10799.7 16794.71,10780.55 IC1.85@16860.91,10780.55 ; v1(16805.86,10174.13) 16805.86,10193.72 U1.2@16806.1,10236.22
  Unused w5: v1(16805.86,10174.13) 16810.86,10174.13 ccw(c16810.86,10179.13) 16812.11,10174.29 16849.48,10183.96 ccw(c16847.6,10191.22) 16849.95,10184.1 17577.99,10424.96 ccw(c17573.21,10439.17) 17578.61,10425.18 17636.68,10448.1 cw(c17710.04,10262.58) 17654.74,10454.26 17748.96,10481.52 ccw(c17747.54,10486.32) 17749.08,10481.56 17883.98,10526.19 ccw(c17882.39,10530.93) 17884.9,10526.6 17991.32,10588.71 ccw(c17983.57,10601.98) 17998.94,10601.98 17998.94,10681.98 ccw(c17983.57,10681.98) 17998.02,10687.24 v1(17983.57,10726.98)
  Layer 3 w5: v1(16775.56,10800.87) 16775.56,10801.09 16775.29,10801.37 16796.46,10813.13 cw(c16803.93,10799.69) 16811.85,10812.87 16818.82,10808.67 cw(c16816.25,10804.39) 16821.25,10804.48 16821.25,10200.46 cw(c16816.25,10200.55) 16820.43,10197.8 16806.68,10176.88 ccw(c16810.86,10174.13) 16805.86,10174.19 v1(16805.86,10174.13) ccw(c16810.86,10174.13) 16806.91,10171.06 16820.93,10152.99 cw(c16816.98,10149.93) 16821.98,10150.02 16821.98,9825.33 cw(c16816.98,9825.42) 16820.52,9821.89 16807.3,9808.63 ccw(c16810.86,9805.12) 16805.86,9805.12 v1(16805.86,9713.5)
  Bottom 6+gnd w5: v1@16806.1,9713.75 U2.2@16806.1,9775.59 ; R56.2@17948.43,10726.14 17982.72,10726.14 v1(17983.57,10726.98)
D1: IC1.86 R57.2 U1.4 U2.4 | length 3162.3
  Top Layer 1 w5: v1(16742.87,10174.13) U1.4@16742.87,10235.97 ; v1(16803.93,10799.69) 16804.2,10799.96 16860.63,10799.96 IC1.86@16860.75,10800.08
  Unused w5: v1(16742.87,10174.13) 16744.35,10172.65 ccw(c16747.87,10176.21) 16745.56,10171.77 16767.32,10160.47 ccw(c16774.36,10174.13) 16774.36,10158.76 16805.86,10158.76 ccw(c16805.86,10174.13) 16811.03,10159.66 16846.38,10171.95 cw(c16871.26,10100.81) 16847.55,10172.35 17581.09,10415.45 ccw(c17573.21,10439.17) 17582.5,10415.97 17640.38,10438.81 cw(c17710.04,10262.58) 17657.5,10444.65 17751.85,10471.95 ccw(c17749.02,10481.54) 17752.16,10472.05 17887.11,10516.69 ccw(c17882.4,10530.93) 17889.32,10517.62 17889.53,10517.73 ccw(c17887.22,10522.17) 17889.74,10517.85 17996.36,10580.07 ccw(c17983.57,10601.98) 18008.94,10601.98 18008.94,10681.98 ccw(c17983.57,10681.98) 18008.31,10687.62 17998.56,10730.4 ccw(c17983.57,10726.98) 17997.62,10733.21 v1(17982.46,10767.45)
  Layer 3 w5: v1(16742.87,9713.5) 16742.87,9805.11 cw(c16747.87,9805.12) 16744.31,9808.63 16757.53,9821.89 ; 16766.69,10312.37 16758.99,10304.67 16758.99,10201.19 ; v1(16803.93,10799.69) 16781.9,10688.37 ; 16757.53,9821.89 ccw(c16753.99,9825.42) 16758.99,9825.33 ; 16757.53,9821.89 ccw(c16753.99,9825.42) 16758.99,9825.33 ; 16757.53,9821.89 ccw(c16753.99,9825.42) 16758.99,9825.33 ; 16757.53,9821.89 ccw(c16753.99,9825.42) 16758.99,9825.33 ; 16757.53,9821.89 ccw(c16753.99,9825.42) 16758.99,9825.33 ; 16757.53,9821.89 ccw(c16753.99,9825.42) 16758.99,9825.33 ; 16757.53,9821.89 ccw(c16753.99,9825.42) 16758.99,9825.33 ; 16757.53,9821.89 ccw(c16753.99,9825.42) 16758.99,9825.33 ; 16757.53,9821.89 ccw(c16753.99,9825.42) 16758.99,9825.33 ; 16757.53,9821.89 ccw(c16753.99,9825.42) 16758.99,9825.33 ; 16757.53,9821.89 ccw(c16753.99,9825.42) 16758.99,9825.33 ; 16757.53,9821.89 ccw(c16753.99,9825.42) 16758.99,9825.33 ; 16757.53,9821.89 ccw(c16753.99,9825.42) 16758.99,9825.33 ; 16757.53,9821.89 ccw(c16753.99,9825.42) 16758.99,9825.33 ; 16757.53,9821.89 ccw(c16753.99,9825.42) 16758.99,9825.33 ; 16757.53,9821.89 ccw(c16753.99,9825.42) 16758.99,9825.33 ; 16757.94,10152.99 cw(c16753.99,10149.93) 16758.99,10150.02 ; 16757.94,10152.99 cw(c16753.99,10149.93) 16758.99,10150.02 ; 16757.94,10152.99 cw(c16753.99,10149.93) 16758.99,10150.02 ; 16757.94,10152.99 cw(c16753.99,10149.93) 16758.99,10150.02 ; 16757.94,10152.99 cw(c16753.99,10149.93) 16758.99,10150.02 ; 16757.94,10152.99 cw(c16753.99,10149.93) 16758.99,10150.02 ; 16757.94,10152.99 cw(c16753.99,10149.93) 16758.99,10150.02 ; 16757.94,10152.99 cw(c16753.99,10149.93) 16758.99,10150.02 ; 16757.94,10152.99 cw(c16753.99,10149.93) 16758.99,10150.02 ; 16757.94,10152.99 cw(c16753.99,10149.93) 16758.99,10150.02 ; 16757.94,10152.99 cw(c16753.99,10149.93) 16758.99,10150.02 ; 16757.94,10152.99 cw(c16753.99,10149.93) 16758.99,10150.02 ; 16757.94,10152.99 cw(c16753.99,10149.93) 16758.99,10150.02 ; 16757.94,10152.99 cw(c16753.99,10149.93) 16758.99,10150.02 ; 16757.94,10152.99 cw(c16753.99,10149.93) 16758.99,10150.02 ; 16757.94,10152.99 cw(c16753.99,10149.93) 16758.99,10150.02 ; 16757.94,10152.99 16743.92,10171.06 cw(c16747.87,10174.13) v1(16742.87,10174.13) 16742.87,10174.19 cw(c16747.87,10174.13) 16743.7,10176.9 16758.15,10198.5 ; 16758.15,10198.5 ccw(c16753.99,10201.28) 16758.99,10201.19 ; 16758.15,10198.5 ccw(c16753.99,10201.28) 16758.99,10201.19 ; 16758.15,10198.5 ccw(c16753.99,10201.28) 16758.99,10201.19 ; 16758.15,10198.5 ccw(c16753.99,10201.28) 16758.99,10201.19 ; 16758.15,10198.5 ccw(c16753.99,10201.28) 16758.99,10201.19 ; 16758.15,10198.5 ccw(c16753.99,10201.28) 16758.99,10201.19 ; 16758.15,10198.5 ccw(c16753.99,10201.28) 16758.99,10201.19 ; 16758.15,10198.5 ccw(c16753.99,10201.28) 16758.99,10201.19 ; 16758.15,10198.5 ccw(c16753.99,10201.28) 16758.99,10201.19 ; 16758.15,10198.5 ccw(c16753.99,10201.28) 16758.99,10201.19 ; 16758.15,10198.5 ccw(c16753.99,10201.28) 16758.99,10201.19 ; 16758.15,10198.5 ccw(c16753.99,10201.28) 16758.99,10201.19 ; 16758.15,10198.5 ccw(c16753.99,10201.28) 16758.99,10201.19 ; 16758.15,10198.5 ccw(c16753.99,10201.28) 16758.99,10201.19 ; 16758.15,10198.5 ccw(c16753.99,10201.28) 16758.99,10201.19 ; 16758.15,10198.5 ccw(c16753.99,10201.28) 16758.99,10201.19 ; 16758.99,9825.33 16758.99,10150.02 ; 16766.7,10312.39 ccw(c16763.12,10315.88) 16768.11,10315.61 ; 16766.7,10312.39 ccw(c16763.12,10315.88) 16768.11,10315.61 ; 16766.7,10312.39 ccw(c16763.12,10315.88) 16768.11,10315.61 ; 16766.7,10312.39 ccw(c16763.12,10315.88) 16768.11,10315.61 ; 16766.7,10312.39 ccw(c16763.12,10315.88) 16768.11,10315.61 ; 16766.7,10312.39 ccw(c16763.12,10315.88) 16768.11,10315.61 ; 16766.7,10312.39 ccw(c16763.12,10315.88) 16768.11,10315.61 ; 16766.7,10312.39 ccw(c16763.12,10315.88) 16768.11,10315.61 ; 16766.7,10312.39 ccw(c16763.12,10315.88) 16768.11,10315.61 ; 16766.7,10312.39 ccw(c16763.12,10315.88) 16768.11,10315.61 ; 16766.7,10312.39 ccw(c16763.12,10315.88) 16768.11,10315.61 ; 16766.7,10312.39 ccw(c16763.12,10315.88) 16768.11,10315.61 ; 16766.7,10312.39 ccw(c16763.12,10315.88) 16768.11,10315.61 ; 16766.7,10312.39 ccw(c16763.12,10315.88) 16768.11,10315.61 ; 16766.7,10312.39 ccw(c16763.12,10315.88) 16768.11,10315.61 ; 16766.7,10312.39 ccw(c16763.12,10315.88) 16768.11,10315.61 ; 16768.11,10315.61 16785.59,10645.65 ; 16781.71,10683.74 cw(c16796.99,10685.43) 16781.9,10688.37 ; 16781.71,10683.74 cw(c16796.99,10685.43) 16781.9,10688.37 ; 16781.71,10683.74 cw(c16796.99,10685.43) 16781.9,10688.37 ; 16781.71,10683.74 cw(c16796.99,10685.43) 16781.9,10688.37 ; 16781.71,10683.74 cw(c16796.99,10685.43) 16781.9,10688.37 ; 16781.71,10683.74 cw(c16796.99,10685.43) 16781.9,10688.37 ; 16781.71,10683.74 cw(c16796.99,10685.43) 16781.9,10688.37 ; 16781.71,10683.74 cw(c16796.99,10685.43) 16781.9,10688.37 ; 16781.71,10683.74 cw(c16796.99,10685.43) 16781.9,10688.37 ; 16781.71,10683.74 cw(c16796.99,10685.43) 16781.9,10688.37 ; 16781.71,10683.74 cw(c16796.99,10685.43) 16781.9,10688.37 ; 16781.71,10683.74 cw(c16796.99,10685.43) 16781.9,10688.37 ; 16781.71,10683.74 cw(c16796.99,10685.43) 16781.9,10688.37 ; 16781.71,10683.74 cw(c16796.99,10685.43) 16781.9,10688.37 ; 16781.71,10683.74 cw(c16796.99,10685.43) 16781.9,10688.37 ; 16781.71,10683.74 cw(c16796.99,10685.43) 16781.9,10688.37 ; 16781.71,10683.74 16785.53,10648.16 ; 16785.53,10648.16 cw(c16770.24,10646.51) 16785.59,10645.65 ; 16785.53,10648.16 cw(c16770.24,10646.51) 16785.59,10645.65 ; 16785.53,10648.16 cw(c16770.24,10646.51) 16785.59,10645.65 ; 16785.53,10648.16 cw(c16770.24,10646.51) 16785.59,10645.65 ; 16785.53,10648.16 cw(c16770.24,10646.51) 16785.59,10645.65 ; 16785.53,10648.16 cw(c16770.24,10646.51) 16785.59,10645.65 ; 16785.53,10648.16 cw(c16770.24,10646.51) 16785.59,10645.65 ; 16785.53,10648.16 cw(c16770.24,10646.51) 16785.59,10645.65 ; 16785.53,10648.16 cw(c16770.24,10646.51) 16785.59,10645.65 ; 16785.53,10648.16 cw(c16770.24,10646.51) 16785.59,10645.65 ; 16785.53,10648.16 cw(c16770.24,10646.51) 16785.59,10645.65 ; 16785.53,10648.16 cw(c16770.24,10646.51) 16785.59,10645.65 ; 16785.53,10648.16 cw(c16770.24,10646.51) 16785.59,10645.65 ; 16785.53,10648.16 cw(c16770.24,10646.51) 16785.59,10645.65 ; 16785.53,10648.16 cw(c16770.24,10646.51) 16785.59,10645.65 ; 16785.53,10648.16 cw(c16770.24,10646.51) 16785.59,10645.65
  Bottom 6+gnd w5: v1@16743.11,9713.75 U2.4@16743.11,9775.59 ; R57.2@17948.43,10767.45 v1(17982.46,10767.45)
D2: IC1.114 R58.2 U1.5 U2.5 | length 3746.5
  Top Layer 1 w5: IC1.114@16684.21,11311.57 16684.21,10700.66 16688.15,10696.73 v1(16688.15,10693.82) ; v1(16711.37,10174.13) 16711.37,10193.72 U1.5@16711.61,10236.22
  Unused w5: v1@16713.86,10172.67 ccw(c16716.37,10176.99) 16713.94,10172.62 16735.47,10160.65 ccw(c16742.87,10174.13) 16737.92,10159.58 16766.34,10150.06 ccw(c16774.36,10174.13) 16774.36,10148.76 16805.86,10148.76 ccw(c16805.86,10174.13) 16814.32,10150.21 16849.68,10162.52 cw(c16871.26,10100.81) 16850.7,10162.86 17584.2,10405.95 ccw(c17573.21,10439.17) 17586.17,10406.66 17644.1,10429.53 cw(c17710.04,10262.58) 17660.24,10435.03 17754.61,10462.34 ccw(c17749.02,10481.54) 17755.3,10462.55 17890.25,10507.19 ccw(c17882.4,10530.93) 17892.12,10507.9 17893.31,10508.4 ccw(c17891.36,10513.01) 17893.88,10508.69 17894.78,10509.21 18001.4,10571.43 ccw(c17983.57,10601.98) 18018.94,10601.98 18018.94,10681.98 ccw(c17983.57,10681.98) 18018.06,10689.85 18008.31,10732.62 ccw(c17983.57,10726.98) 18007.97,10733.92 17997.25,10771.66 ccw(c17982.46,10767.45) 17996.65,10773.36 v1(17982.46,10807.45)
  Layer 3 w5: v1(16688.15,10693.82) 16739.14,10637.17 cw(c16727.71,10626.89) 16743.05,10627.9 16743.06,10627.74 16746.21,10572.32 ; v1(16711.37,9713.5) 16711.37,9805.11 cw(c16716.37,9805.12) 16712.82,9808.63 16726.03,9821.89 ; 16726.03,9821.89 ccw(c16722.49,9825.42) 16727.49,9825.33 ; 16726.03,9821.89 ccw(c16722.49,9825.42) 16727.49,9825.33 ; 16726.03,9821.89 ccw(c16722.49,9825.42) 16727.49,9825.33 ; 16726.03,9821.89 ccw(c16722.49,9825.42) 16727.49,9825.33 ; 16726.03,9821.89 ccw(c16722.49,9825.42) 16727.49,9825.33 ; 16726.03,9821.89 ccw(c16722.49,9825.42) 16727.49,9825.33 ; 16726.03,9821.89 ccw(c16722.49,9825.42) 16727.49,9825.33 ; 16726.03,9821.89 ccw(c16722.49,9825.42) 16727.49,9825.33 ; 16726.03,9821.89 ccw(c16722.49,9825.42) 16727.49,9825.33 ; 16726.03,9821.89 ccw(c16722.49,9825.42) 16727.49,9825.33 ; 16726.03,9821.89 ccw(c16722.49,9825.42) 16727.49,9825.33 ; 16726.03,9821.89 ccw(c16722.49,9825.42) 16727.49,9825.33 ; 16726.03,9821.89 ccw(c16722.49,9825.42) 16727.49,9825.33 ; 16726.03,9821.89 ccw(c16722.49,9825.42) 16727.49,9825.33 ; 16726.03,9821.89 ccw(c16722.49,9825.42) 16727.49,9825.33 ; 16726.03,9821.89 ccw(c16722.49,9825.42) 16727.49,9825.33 ; 16726.44,10152.99 cw(c16722.49,10149.93) 16727.49,10150.02 ; 16726.44,10152.99 cw(c16722.49,10149.93) 16727.49,10150.02 ; 16726.44,10152.99 cw(c16722.49,10149.93) 16727.49,10150.02 ; 16726.44,10152.99 cw(c16722.49,10149.93) 16727.49,10150.02 ; 16726.44,10152.99 cw(c16722.49,10149.93) 16727.49,10150.02 ; 16726.44,10152.99 cw(c16722.49,10149.93) 16727.49,10150.02 ; 16726.44,10152.99 cw(c16722.49,10149.93) 16727.49,10150.02 ; 16726.44,10152.99 cw(c16722.49,10149.93) 16727.49,10150.02 ; 16726.44,10152.99 cw(c16722.49,10149.93) 16727.49,10150.02 ; 16726.44,10152.99 cw(c16722.49,10149.93) 16727.49,10150.02 ; 16726.44,10152.99 cw(c16722.49,10149.93) 16727.49,10150.02 ; 16726.44,10152.99 cw(c16722.49,10149.93) 16727.49,10150.02 ; 16726.44,10152.99 cw(c16722.49,10149.93) 16727.49,10150.02 ; 16726.44,10152.99 cw(c16722.49,10149.93) 16727.49,10150.02 ; 16726.44,10152.99 cw(c16722.49,10149.93) 16727.49,10150.02 ; 16726.44,10152.99 cw(c16722.49,10149.93) 16727.49,10150.02 ; 16726.44,10152.99 16712.45,10171.03 cw(c16716.37,10174.13) v1(16711.37,10174.13) 16711.37,10174.19 cw(c16716.37,10174.13) 16712.45,10177.24 16726.9,10195.45 ; 16726.9,10195.45 ccw(c16722.98,10198.56) 16727.98,10198.47 ; 16726.9,10195.45 ccw(c16722.98,10198.56) 16727.98,10198.47 ; 16726.9,10195.45 ccw(c16722.98,10198.56) 16727.98,10198.47 ; 16726.9,10195.45 ccw(c16722.98,10198.56) 16727.98,10198.47 ; 16726.9,10195.45 ccw(c16722.98,10198.56) 16727.98,10198.47 ; 16726.9,10195.45 ccw(c16722.98,10198.56) 16727.98,10198.47 ; 16726.9,10195.45 ccw(c16722.98,10198.56) 16727.98,10198.47 ; 16726.9,10195.45 ccw(c16722.98,10198.56) 16727.98,10198.47 ; 16726.9,10195.45 ccw(c16722.98,10198.56) 16727.98,10198.47 ; 16726.9,10195.45 ccw(c16722.98,10198.56) 16727.98,10198.47 ; 16726.9,10195.45 ccw(c16722.98,10198.56) 16727.98,10198.47 ; 16726.9,10195.45 ccw(c16722.98,10198.56) 16727.98,10198.47 ; 16726.9,10195.45 ccw(c16722.98,10198.56) 16727.98,10198.47 ; 16726.9,10195.45 ccw(c16722.98,10198.56) 16727.98,10198.47 ; 16726.9,10195.45 ccw(c16722.98,10198.56) 16727.98,10198.47 ; 16726.9,10195.45 ccw(c16722.98,10198.56) 16727.98,10198.47 ; 16727.49,9825.33 16727.49,10150.02 ; 16727.98,10198.47 16727.98,10314.09 cw(c16732.98,10314.1) 16728.34,10315.95 16741.71,10349.4 ; 16741.71,10349.4 ccw(c16718.15,10358.82) 16743.52,10358.48 ; 16741.71,10349.4 ccw(c16718.15,10358.82) 16743.52,10358.48 ; 16741.71,10349.4 ccw(c16718.15,10358.82) 16743.52,10358.48 ; 16741.71,10349.4 ccw(c16718.15,10358.82) 16743.52,10358.48 ; 16741.71,10349.4 ccw(c16718.15,10358.82) 16743.52,10358.48 ; 16741.71,10349.4 ccw(c16718.15,10358.82) 16743.52,10358.48 ; 16741.71,10349.4 ccw(c16718.15,10358.82) 16743.52,10358.48 ; 16741.71,10349.4 ccw(c16718.15,10358.82) 16743.52,10358.48 ; 16741.71,10349.4 ccw(c16718.15,10358.82) 16743.52,10358.48 ; 16741.71,10349.4 ccw(c16718.15,10358.82) 16743.52,10358.48 ; 16741.71,10349.4 ccw(c16718.15,10358.82) 16743.52,10358.48 ; 16741.71,10349.4 ccw(c16718.15,10358.82) 16743.52,10358.48 ; 16741.71,10349.4 ccw(c16718.15,10358.82) 16743.52,10358.48 ; 16741.71,10349.4 ccw(c16718.15,10358.82) 16743.52,10358.48 ; 16741.71,10349.4 ccw(c16718.15,10358.82) 16743.52,10358.48 ; 16741.71,10349.4 ccw(c16718.15,10358.82) 16743.52,10358.48 ; 16743.52,10358.48 16745.61,10516.74 16746.26,10569.88 ; 16746.21,10572.32 cw(c16710.89,10570.31) 16746.26,10569.88 ; 16746.21,10572.32 cw(c16710.89,10570.31) 16746.26,10569.88 ; 16746.21,10572.32 cw(c16710.89,10570.31) 16746.26,10569.88 ; 16746.21,10572.32 cw(c16710.89,10570.31) 16746.26,10569.88 ; 16746.21,10572.32 cw(c16710.89,10570.31) 16746.26,10569.88 ; 16746.21,10572.32 cw(c16710.89,10570.31) 16746.26,10569.88 ; 16746.21,10572.32 cw(c16710.89,10570.31) 16746.26,10569.88 ; 16746.21,10572.32 cw(c16710.89,10570.31) 16746.26,10569.88 ; 16746.21,10572.32 cw(c16710.89,10570.31) 16746.26,10569.88 ; 16746.21,10572.32 cw(c16710.89,10570.31) 16746.26,10569.88 ; 16746.21,10572.32 cw(c16710.89,10570.31) 16746.26,10569.88 ; 16746.21,10572.32 cw(c16710.89,10570.31) 16746.26,10569.88 ; 16746.21,10572.32 cw(c16710.89,10570.31) 16746.26,10569.88 ; 16746.21,10572.32 cw(c16710.89,10570.31) 16746.26,10569.88 ; 16746.21,10572.32 cw(c16710.89,10570.31) 16746.26,10569.88 ; 16746.21,10572.32 cw(c16710.89,10570.31) 16746.26,10569.88
  Bottom 6+gnd w5: v1@16711.61,9713.75 U2.5@16711.61,9775.59 ; R58.2@17947.32,10807.66 17982.25,10807.66 v1(17982.46,10807.45)